# Altium PCB Main_Controller.PcbDoc (part 2 of 2)
Units mil, origin at the board's own origin, x right, y up, seen from the top; angles counter-clockwise.
Board outline 1790 x 1950 mil, 2 copper layers (Top Layer, Bottom Layer); 84 components, 64 nets, 348 pads, 50 vias.
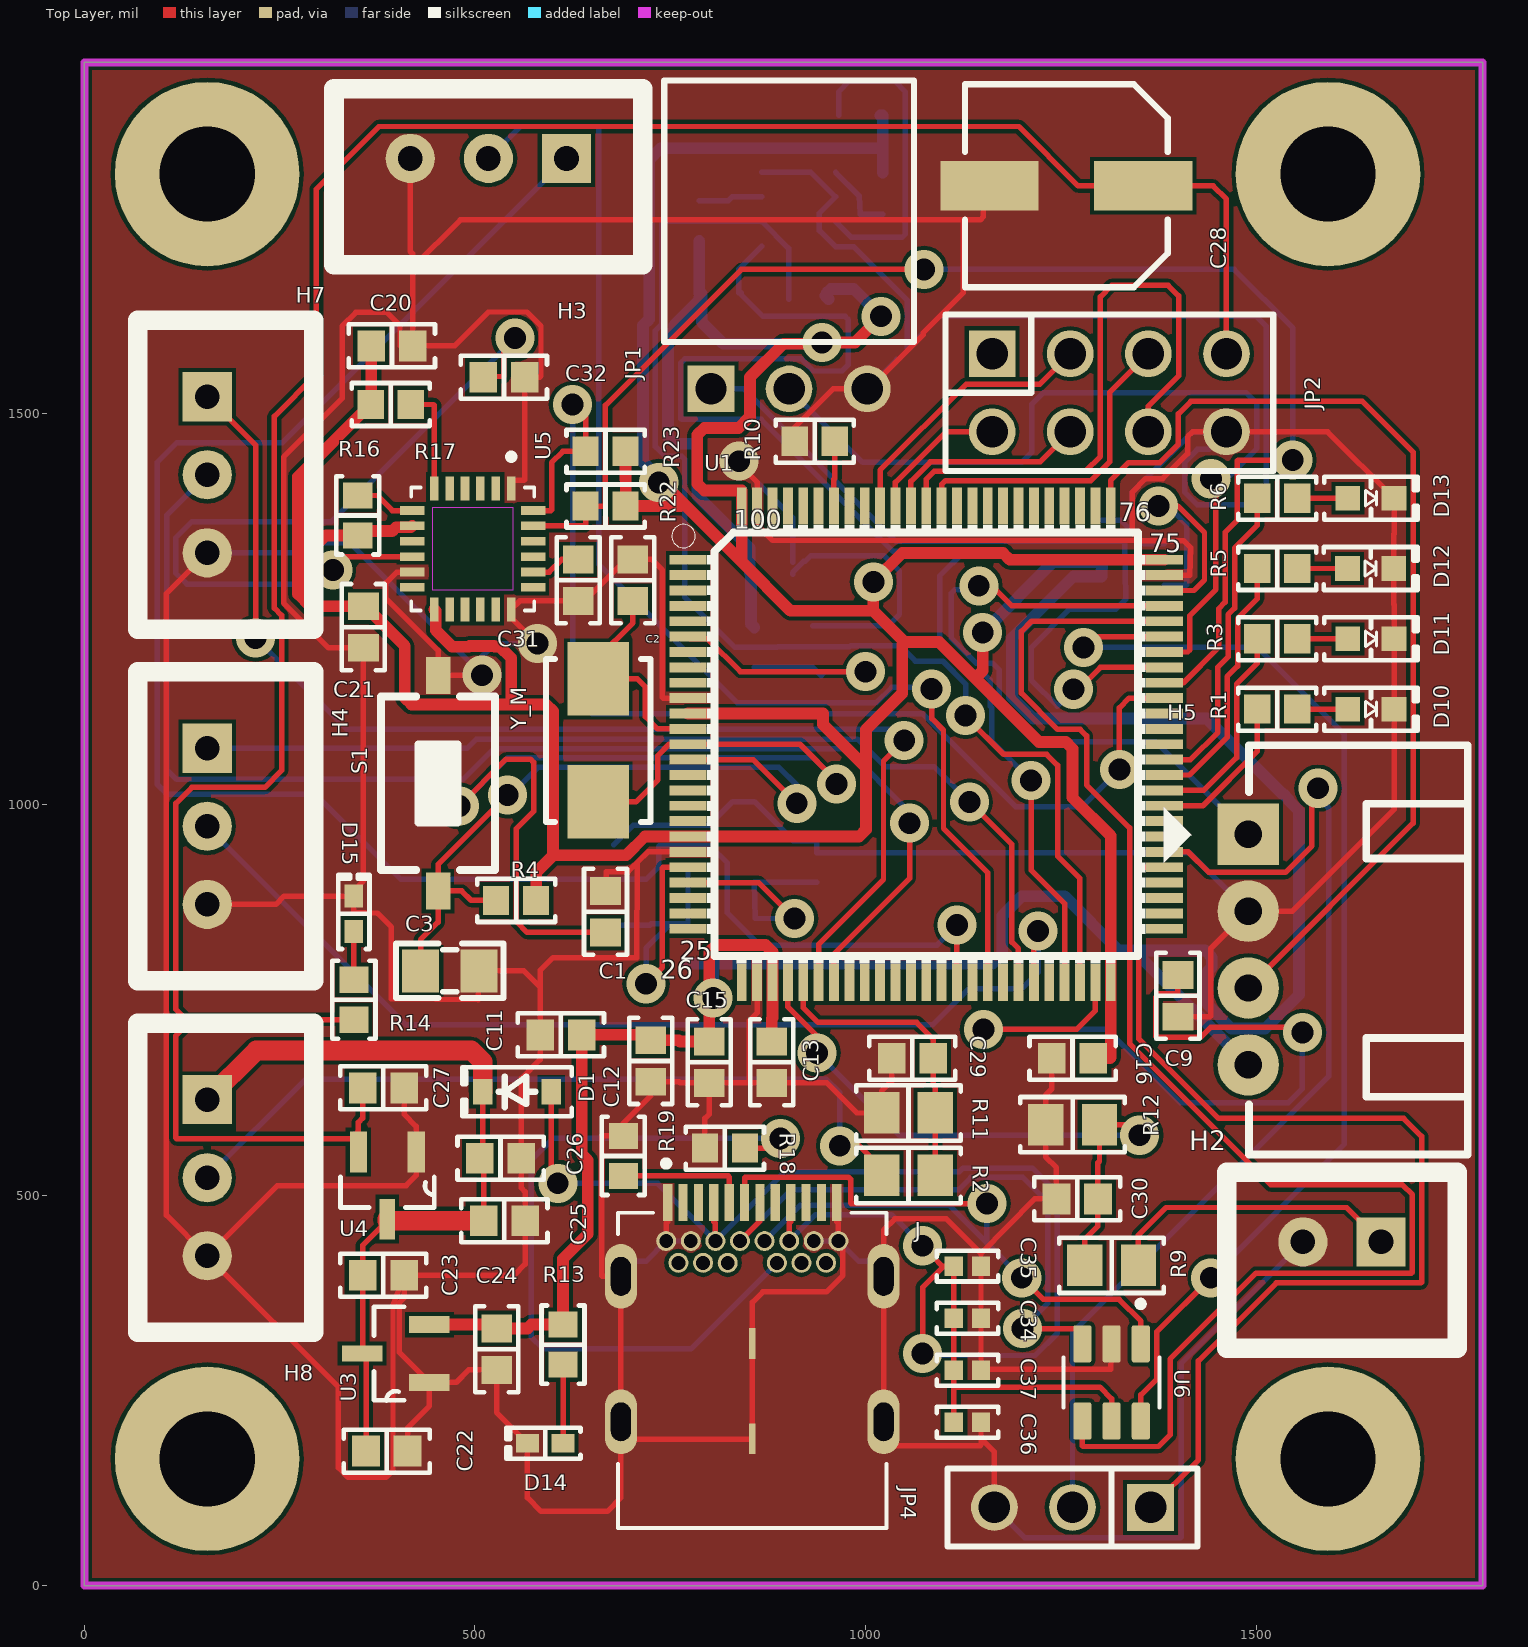
[diagram p0: Top Layer view]

## Part data (continued)
U1: "ARMÂ® CortexÂ®-M4 STM32F4 Microcontroller IC 32-Bit Single-Core 168MHz 512KB (512K x 8) FLASH 100-LQFP (14x14)", Package="LQFP-100 STMicroelectronics", Availability="In Stock", Check_prices=https://www.snapeda.com/parts/STM32F407VET6/STMicroelectronics/view-part/?ref=eda, MF=STMicroelectronics, MP=STM32F407VET6, Price=None, Purchase-URL=https://pricing.snapeda.com/search/part/STM32F407VET6/?ref=eda, SnapEDA_Link=https://www.snapeda.com/parts/STM32F407VET6/STMicroelectronics/view-part/?ref=snap
U2: "Gas, Humidity, Pressure, Temperature Sensor IÂ²C, SPI Output", Package="LGA-8 Bosch Tools", Availability="In Stock", Check_prices=https://www.snapeda.com/parts/BME680/Bosch+Sensortec/view-part/?ref=eda, MF="Bosch Sensortec", MP=BME680, Price=None, Purchase-URL=https://pricing.snapeda.com/search/part/BME680/?ref=eda, SnapEDA_Link=https://www.snapeda.com/parts/BME680/Bosch+Sensortec/view-part/?ref=snap
U3 U4: "Linear Voltage Regulator IC 1 Output 250mA SOT-23-3", Package="SOT-23-3 Microchip", Availability=Unavailable, MF=Microchip, MP=MCP1700T-3302E/TT, Price=None, SnapEDA_Link=https://www.snapeda.com/parts/MCP1700T-3302E/TT/Microchip/view-part/50877/?ref=snap
U5: "MPU-6050 series Accelerometer, Gyroscope, 3 Axis Sensor Evaluation Board", Package="QFN-24 InvenSense", Check_prices=https://www.snapeda.com/parts/MPU-6050/TDK+InvenSense/view-part/?ref=eda, MF="TDK InvenSense", MP=MPU-6050, SnapEDA_Link=https://www.snapeda.com/parts/MPU-6050/TDK+InvenSense/view-part/?ref=snap
U6: "17V Clamp 5A (8/20Âµs) Ipp Tvs Diode Surface Mount SOT-23-6", Package="SOT-23-6 STMicroelectronics", Check_prices=https://www.snapeda.com/parts/USBLC6-2SC6/STMicroelectronics/view-part/?ref=eda, MF=STMicroelectronics, MP=USBLC6-2SC6, SnapEDA_Link=https://www.snapeda.com/parts/USBLC6-2SC6/STMicroelectronics/view-part/?ref=snap
Y_M: library part NX5032GA-8MHZ-EXS00A-CG07039, "CRYSTAL 8.0000MHZ 18PF SMD", ESR (Equivalent Series Resistance)="300 Ohms", Frequency Stability=±30ppm, Frequency Tolerance=±20ppm, Load Capacitance=18pF, Manufacturer="NDK America, Inc.", Operating Mode=Fundamental, Operating Temperature="-40°C ~ 85°C", Package / Case="2-SMD, No Lead", Supplier Part Number 1=644-1318-1-ND, componentlink1description=Datasheet, componentlink1url=//media.digikey.com/pdf/Data%20Sheets/NDK%20PDFs/NX5032GA-8MHz-EXS00A-CG07039.pdf, componentlink2description="DigiKey Link", componentlink2url=https://www.digikey.com/en/products/detail/ndk-america-inc/NX5032GA-8MHZ-EXS00A-CG07039/8275423, Frequency="8 MHz", Height - Seated (Max)="0.059\" (1.50mm)", lastupdated="6/3/2024 8:02:22 PM", Lifecycle Status=Active, Minimum Order=1, Mounting Type="Surface Mount", packaging=TapeAndReel, Part Number=NX5032GA-8MHZ-EXS00A-CG07039, Part Status=Active, partid=609, Price=0.32, series=NX5032GA, Size / Dimension="0.197\" L x 0.126\" W (5.00mm x 3.20mm)", Supplier 1=DigiKey, Type="MHz Crystal"

## Free pads (board coordinates)
  round 236.22 hole 122.05: 9(157.11,162.11) 9(157.11,1807.11) 9(1592.11,162.11) 9(1592.11,1807.11)

## Via types
v1: diameter 50, hole 28, Top Layer to Bottom Layer, 50 vias

## Nets (pads, with @x,y where several pads share a name; then routed paths per layer and width w, separated by ;. In a path a pad name is that pad's centre, name@x,y a point inside that pad or via, vN(x,y) a via of type N, cw(c..) or ccw(c..) an arc to the next point about the centre after c; other vN are vias at no path point)
+5: C22.2 C23.2 C25.2 C26.2 D1.2 H8.1 U3.3 U4.3 | length 1156.6
  Top Layer w7: U3.3 U3.3@360.5,297.11 ; C22.2 U3.3@360.5,297.11 ; D1.2 510.06,547.11 511.13,546.05 C25.2 387.7,467.11 356.13,435.54 C23.2 356.13,301.49 U3.3@360.5,297.11
  Top Layer w25: H8.1 220,685 495.42,685 510.06,670.36 D1.2 ; U4.3 387.7,467.11 387.7,467 511.13,467 C25.2 ; C26.2 C26.2@510.06,547.11
+5_USB_A: C34.1 C35.1 C36.1 C37.1 D1.1 J.A4 J.A9 J.B4 J.B9 U6.5 | length 2133.6
  Top Layer w7: D1.1 597.66,523.34 v1(606,515) ; J.A4 805.79,465.97 807.76,464 J.B9 ; J.B4 902.24,464 904.21,465.97 J.A9 ; v1(1073,297) 1073,381.87 1099,407.87 ; v1(1073,435) 1099,407.87 ; C36.1 1113.21,255 ; U6.5 1315,239 1300,254 1114.21,254 1113.21,255 ; 1099,407.87 1100,408.87 C35.1 ; 1099,407.87 C35.1 ; 1113.21,255 C37.1 C34.1 C35.1
  Bottom Layer w7: v1(606,515) 733.86,515 J.B9 896.15,529.5 1119.85,529.5 1124.85,534.5 1213.5,534.5 1245.5,502.5 1245.5,323 1217.02,294.52 1075.48,294.52 v1(1073,297) ; J.B4 936.14,475 1033,475 v1(1073,435)
AD0_6050: U5.9
BME_SCL: R20.1 U1.47 U2.4 | length 1654.5
  Top Layer w7: v1(1212,1030.5) 1212,916 1254.87,873.13 U1.47
  Bottom Layer w7: R20.1@837.7,1655 837.7,1685.38 U2.4 ; R20.1 840.59,1653.03 868.62,1625 973.9,1625 978,1620.9 978,1563 970,1555 933.56,1555 918.02,1570.53 768.67,1570.53 763.69,1565.55 763.69,1494 764.69,1493 866.35,1493 1035.35,1324 1125,1324 1125.75,1323.25 1095,1292.5 1095,1205 1131,1169 1150,1169 1159.5,1159.5 1159.5,1125.94 1161.69,1123.75 1161.69,1080.81 v1(1212,1030.5)
BME_SDA: R21.1 U1.48 U2.3 | length 1635.4
  Top Layer w7: v1(1128.19,1114.02) 1130,1112.21 1130,1111 1176.96,1064.04 1231.96,1064.04 1246,1050 1246,934 1274.55,905.45 U1.48
  Bottom Layer w7: R21.1@901.52,1647.11 901.52,1712.03 U2.3 866.55,1747 743.1,1747 739,1742.9 739,1614.59 731,1606.59 731,1458.05 743.1,1445.95 764.63,1445.95 768.73,1441.85 768.73,1265.27 833,1201 887,1201 887.75,1201.75 979.38,1201.75 981.12,1203.5 1043.88,1203.5 1063.88,1183.5 1098.88,1183.5 1128.19,1154.19 v1(1128.19,1114.02)
BOOT0: R10.2 U1.94 | length 83.2
  Top Layer w7: U1.94 959.59,1416.59 960.59,1417.59 R10.2
CC1: J.A5 R19.2 | length 168.7
  Top Layer w7: R19.2 824.06,524.41 825.47,523 J.A5
CC2: J.B5 R18.2 | length 973.7
  Top Layer w7: R18.2 878.5,560 v1(891,572.5)
  Bottom Layer w7: J.B5 776.35,303 587.5,303 572,318.5 572,544.5 600,572.5 v1(891,572.5)
Debug_RX: JP1.2 U1.69 | length 1117.4
  Top Layer w7: U1.69 1412.5,1195.22 1415.13,1197.85 1415.13,1241.94 1448.5,1275.31 1448.5,1411 v1(1442.5,1417)
  Bottom Layer w7: JP1.2 996.22,1438 1200,1438 1213,1451 1213,1512.5 1227.5,1527 1487.5,1527 1501,1513.5 1501,1456 1462,1417 v1(1442.5,1417)
Debug_TX: JP1.1 U1.68 | length 1078.1
  Top Layer w7: v1(1266.5,1147.5) 1272.66,1147.5 1300.7,1175.54 U1.68
  Bottom Layer w7: JP1.1 844.21,1532.11 1039.32,1337 1332,1337 1333,1262.5 1320.5,1250 1261.32,1250 1212.5,1201.18 1212.5,1159 1245.5,1126 1266.5,1147 v1(1266.5,1147.5)
EmCo_Rx: JP4.2 U1.56 | length 1352.9
  Top Layer w7: U1.56 1413.19,939.31 1439.5,913 1537.5,913 1571.5,947 1571.5,1013 v1(1579.27,1020.77)
  Bottom Layer w7: JP4.2 1265,324 1592.87,651.87 1592.87,995.53 1579.27,1009.13 v1(1579.27,1020.77)
EmCo_Tx: JP4.1 U1.55 | length 1392.7
  Top Layer w7: JP4.1 1426,161 1426,287.5 1526,387.5 1711,387.5 1712,388.5 1712,575 1689,598 1452.02,598 1350,700.02 1350,918.63 1351,919.63 U1.55
GND: C1.1 C2.1 C3.2 C4.2 C5.1 C6.2 C7.2 C8.1 C9.1 C10.1 C11.1 C12.1 C13.1 C14.1 C15.1 C16.1 C17.1 C20.1 C21.2 C22.1 C23.1 C24.1 C25.1 C26.1 C27.1 C28.2 C29.1 C30.1 C31.1 C32.1 C34.2 C35.2 C36.2 C37.2 D10.2 D11.2 D12.2 D13.2 D14.2 D15.2 H2.2 H3.3 H4.3 H5.2 H7.3 H8.3 J.A1 J.A12 J.B1 J.B12 J.G1 J.G2 J.G3 J.G4 J.S1 J.S2 J.S3 J.S4 JP1.3 JP2.5 JP4.3 R10.1 R11.1 R12.1 R18.1 R19.1 S1.1 U1.10 U1.20 U1.27 U1.74 U1.99 U2.1 U2.5 U2.7 U3.1 U4.1 U5.1 U5.11 U5.18 U6.2 | length 17545.2
  Top Layer w7: H4.3 245,872.11 255.53,882.64 D15.2 ; H7.3 105,1270 105,474.22 H8.3 ; C27.1 409.28,603.42 424.7,588 U4.1 424.7,525 411.7,512 247,512 H8.3 ; C22.1 413.65,202 441.58,229.93 U3.1 ; H3.3 417.11,1708.15 420.26,1705 420.26,1687.5 ; U5.11 400,1297.58 386,1283.58 386,1264 452.7,1197.3 S1.1@452.7,1165 ; S1.1 S1.1@452.7,1165 ; v1(508.82,1165.5) 453.2,1165.5 S1.1@452.7,1165 ; U5.1 546.32,1415 562.69,1415 563.69,1416 C32.1 583,1547.11 584.5,1548.61 584.5,1612.5 566.5,1630.5 517.18,1630.5 473.79,1587.11 C20.1 ; v1(580,1206) 546.32,1239.68 U5.18 557.31,1260.54 C31.1 640,1260.54 693.15,1313.69 C2.1 726.31,1313.69 740,1300 740,1137.17 741,1136.17 U1.10 ; C1.1 668.11,914 695.95,914 708,926.05 ; J.B12 744.76,464 746.73,465.97 J.A1 ; U1.20 721.26,939.31 708,926.05 ; R18.1 794.41,598 800,603.59 C15.1 ; v1(838,1439.5) 838,1436 861.17,1412.83 U1.99 861.17,1357.83 880.89,1338.11 1352.08,1337.92 ; U1.27 861.17,733.17 851,723 851,644.43 852,643.43 ; R10.1 909.41,1483.02 958.5,1532.11 JP1.3 1004.49,1532.11 1074,1601.62 1074,1604 1125,1655 1125,1748.5 ; J.A12 963.27,465.97 965.24,464 J.B1 971,441.1 971,397 950,376 868.5,376 855,362.5 J.G3 J.G4 855,187 J.S3@686.89,187 ; C29.1 1033.42,645.87 1020.55,633 R11.1 989,605 950.58,643.43 C13.1 852,643.43 ; C36.2 1147.86,188.16 ; C37.2 C37.2@1147.86,287.5 ; C28.2 1151,1784.42 1151,1752.6 1146.9,1748.5 1125,1748.5 ; JP4.3 1165,171.02 1147.86,188.16 ; C16.1 1238.43,635.77 1230.65,628 R12.1 1230.65,548.79 1244.45,535 C30.1 1216.5,495 1147.86,425 ; U6.2 1314,277 1158.36,277 C37.2@1147.86,287.5 ; U1.74 1415,1293.65 1416.29,1328.71 1407.08,1337.92 1352.08,1337.92 ; C9.1 1441,728.43 1442,729.43 1442,815.43 H5.2 1546.43,863.43 1676.64,993.63 D10.2 D11.2 1676.64,1256 1676.17,1256.47 D12.2 1676.17,1346 1676.64,1346.47 D13.2 1591.64,1477.11 JP2.5 1418.61,1477.11 1412.53,1471.03 1412.53,1449.19 1380.5,1417.17 1358.67,1417.17 1341.5,1400 1341.5,1348.5 1352.08,1337.92 ; H8.3 325,254.22 325,151 337.5,138.5 386,138.5 395,147.5 395,358.72 C23.1 ; D15.2 345,862 375,861 393,843 393,751 504.28,750 C3.2 562.5,786.98 583.42,766.05 ; D15.2 345,890 357.11,902.11 C21.2 312.5,1200.54 255,1258.04 255,1445 330,1520 330,1612.5 347.5,1630 387.5,1630 404,1613.5 404,1587.11 C20.1 ; C23.1 409.28,368.28 403,362 403,298.69 U3.1 ; C23.1 550,397.11 564.28,411.39 C25.1 564.28,504 559.28,509 C26.1 559.28,649.28 583.42,673.42 C11.1 583.42,766.05 ; C20.1 420.26,1687.5 ; 420.26,1687.5 481.26,1748.5 1125,1748.5 ; U3.1 476,260.11 491.93,276.04 C24.1 527.7,221.84 D14.2 567,182.11 567,112.5 584.5,95 669.39,95 686.89,112.5 J.S3@686.89,187 ; 583.42,766.05 583.42,787.5 599.92,804 707,804 708,926.05 ; J.S3@686.89,187 J.S3 J.S1 663,395.83 662,396.83 662,574.59 663,575.59 R19.1 690,592 725,627 C12.1 761,645 762.57,643.43 C15.1 ; C15.1 852,643.43 ; 1147.86,188.16 1147.86,180 1146.86,179 1023.11,179 J.S4 J.S2 1023.11,455.07 1037.5,469.46 1103.4,469.46 1147.86,425 ; C37.2@1147.86,287.5 C34.2 C35.2 1147.86,425
  Bottom Layer w7: H7.3 273.92,1322.11 286.72,1334.9 340.1,1334.9 v1@509.41,1165.59 ; v1(508.82,1165.5) 508.91,1165.59 v1@509.41,1165.59 ; v1(580,1206) 525,1206 510,1191 510,1165 v1@509.41,1165.59 ; C4.2 702.7,973.69 C5.1 800,973.69 830,1003.69 C6.2 907.7,953.69 C7.2 937.7,938 1415.43,938 H5.2 ; J.S1 686.89,415 718.66,415 J.B12 J.G2 ; v1(838,1439.5) 838,1436 906.58,1367.42 C14.1@906.58,1310 ; U2.1 930.18,1809.35 U2.7 941,1757.18 941,1734.76 U2.5 984.87,1714.08 1053.5,1645.45 1053.5,1581.12 ; C14.1 906.58,1296.97 920.79,1311.19 922.76,1311.19 930.08,1318.5 1023.88,1318.5 1043.5,1298.88 1043.5,1243.5 1028.69,1228.69 C17.1 ; J.G1 J.B1 991.34,415 1023.11,415 J.S2 ; JP1.3 1040,1570 ; 1041.19,1568.81 1050,1577.62 ; JP4.3 1204,61 1403,61 1404,62 1404,284 H2.2 ; C8.1 1326.81,1363.69 1341.5,1349 ; C10.1 1356.81,1333.69 1341.5,1349 ; 1050,1577.62 1053.5,1581.12 ; 1050,1577.62 1053.5,1581.12 ; 1053.5,1581.12 1053.5,1583.5 1095,1625 1500.5,1625 1513,1612.5 1513,1396 1500.5,1383.5 1425,1383.5 1409,1399.5 1409,1438.63 1425,1454.63 1439.63,1454.63 JP2.5 1418.61,1477.11 1341.5,1400 1341.5,1349
INT_6050: U5.12
LED1: R1.1 U1.59 | length 201.7
  Top Layer w7: U1.59 1432,998.37 1501.52,1067.89 R1.1
LED2: R3.1 U1.60 | length 272.6
  Top Layer w7: U1.60 1433,1018.06 1475,1060.06 1475,1154.01 1501.52,1180.53 R3.1
LED3: R5.1 U1.61 | length 332.2
  Top Layer w7: U1.61 1414.74,1037.74 1463,1086 1463,1163.71 1476.29,1177 1476.29,1238 1501.52,1263.23 R5.1
LED4: R6.1 U1.62 | length 403.3
  Top Layer w7: U1.62 1416,1057.43 1451,1092.43 1451,1175.71 1464.29,1189 1464.29,1243.1 1472.5,1251.31 1472.5,1328.19 1501.52,1357.21 R6.1
MOTOR3A: H3.1 U1.40 | length 2378.9
  Top Layer w7: U1.40 v1(1117.07,845.5)
  Bottom Layer w7: H3.1 253,1463 118,1463 93.11,1438.11 93.11,1025.89 106,1013 296,1013 405,904 719,904 735,920 735,946 736,947 801,947 823,925 823,861.14 864.14,820 1091.57,820 v1(1117.07,845.5)
MOTOR3B: H3.2 U1.42 | length 1632.3
  Top Layer w7: v1(1084.66,1147.64) 1085,1147.3 1085,1109.84 1099.81,1095.03 1099.81,969.5 1156.44,912.87 U1.42
  Bottom Layer w7: H3.2 558,1868 657,1868 658.5,1866.5 658.5,1307.5 836,1130 1013.59,1130 1033.59,1150 1082.3,1150 v1(1084.66,1147.64)
MOTOR4A: H4.1 U1.44 | length 1271.3
  Top Layer w7: v1(1133.31,1003) 1187.5,948.81 1187.5,823.81 1195.81,815.5 U1.44
  Bottom Layer w7: H4.1 490.31,1072.11 501.82,1083.62 989.74,1083.62 1025,1048.36 1087.95,1048.36 v1(1133.31,1003)
MOTOR4B: H4.2 U1.45 | length 1318.4
  Top Layer w7: U1.45 1215.5,832.49 v1(1221,837.99)
  Bottom Layer w7: H4.2 411.52,717.7 1085.7,717.7 1132,764 1200,764 1221,785 v1(1221,837.99)
MOTOR_PUMPA: H7.1 U1.31 | length 1574.9
  Top Layer w7: H7.1 219,1460.22 v1(219,1213) ; U1.31 939.91,820.91 1023,904 1023,1055.5 v1(1049.5,1082)
  Bottom Layer w7: v1(219,1213) 335.5,1096.5 1035,1096.5 v1(1049.5,1082)
MOTOR_PUMPB: H7.2 U1.32 | length 1664.2
  Top Layer w7: U1.32 959.59,808.5 1056.5,905.41 v1(1056.5,976)
  Bottom Layer w7: H7.2 105.11,1370.11 105.11,1044.89 118,1032 484.58,1032 524.2,1071.62 975.42,1071.62 1056.5,990.54 v1(1056.5,976)
MPU_SCL: R22.1 U1.67 U5.23 | length 1805.7
  Top Layer w7: U5.23 640.16,1356.64 641.52,1358 R22.1 666,1382.11 667,1383.11 667,1511 841,1685 v1(1075,1685) ; U1.67 1406.85,1155.85 1452,1201 1452,1250.5 1460.5,1259 1460.5,1348.5 1476,1364 1476,1440 1477,1441 v1(1547,1441)
  Bottom Layer w7: v1(1075,1685) 1472,1685 1547,1610 v1(1547,1441)
MPU_SDA: R23.1 U1.66 U5.24 | length 1492.5
  Top Layer w7: U5.24 597,1376.32 598,1377.32 598,1437.61 612.5,1452.11 R23.1 641.52,1495.48 v1(625,1512) ; v1(1325,1045) 1325,1123.67 1337.5,1136.17 U1.66
  Bottom Layer w7: v1(625,1512) 625,1141 650,1116 1073.5,1116 1192.5,997 1277,997 v1(1325,1045)
NetC18_1: C18.1 U2.6 | length 408.6
  Bottom Layer w7: U2.6 981.96,1726.08 1046.58,1726.08 1051,1730.5 1051,1912.5 1037.5,1926 979.04,1926 965.54,1912.5 C18.1
NetC19_1: C19.1 U2.8 | length 95.5
  Bottom Layer w7: U2.8 991.96,1779.07 993,1755.54 C19.1
NetC31_2: C31.2 U5.20 | length 64.1
  Top Layer w7: U5.20 595,1297.58 611.1,1313.69 C31.2
NetC32_2: C32.2 U5.10 | length 989.4
  Top Layer w7: v1(318,1300) 335.27,1317.27 U5.10 ; C32.2 537,1548.11 537,1583 v1(551,1597)
  Bottom Layer w7: v1(318,1300) 300,1282 131,1282 117.11,1295.89 117.11,1341.72 137.5,1362.11 316.11,1362.11 v1(551,1597)
NetD10_1: D10.1 R1.2 | length 64.9
  Top Layer w7: R1.2 D10.1
NetD11_1: D11.1 R3.2 | length 64.9
  Top Layer w7: R3.2 D11.1
NetD12_1: D12.1 R5.2 | length 64.4
  Top Layer w7: R5.2 D12.1
NetD13_1: D13.1 R6.2 | length 64.9
  Top Layer w7: R6.2 D13.1
NetD14_1: D14.1 R13.1 | length 100.8
  Top Layer w7: D14.1 R13.1
NetD15_1: D15.1 R14.1 | length 61.8
  Top Layer w7: R14.1 D15.1
NetJ_A6: J.A6 J.B6 U6.1 | length 1015.9
  Top Layer w7: J.A6 845.16,522 846.16,523 978,523 981,520 981,490 982,489 v1(1155.5,489) ; v1(1200,394) 1227.72,366.28 1324.63,366.28 1352.4,338.5 U6.1
  Bottom Layer w7: J.B6 916.65,487 1107,487 1155.5,438.5 ; v1(1155.5,489) 1155.5,438.5 ; v1(1200,394) 1155.5,438.5
NetJ_A7: J.A7 J.B7 U6.3 | length 772.2
  Top Layer w7: J.B7 864.84,466.69 J.A7 ; v1(1201,329) 1277.6,329 U6.3
  Bottom Layer w7: J.B7 905.15,507 1119.5,507 1135,522.5 1201.5,522.5 1233.5,490.5 1233.5,361.5 v1(1201,329)
NetR15_1: R15.1 U2.2 | length 82.2
  Bottom Layer w7: R15.1 824,1772.7 829.16,1777.86 U2.2
NetR16_1: R16.1 U5.7 | length 77.5
  Top Layer w7: R16.1 375,1395.59 394.27,1376.32 U5.7
NetR17_1: R17.1 U5.6 | length 137
  Top Layer w7: R17.1 446.79,1512.11 447.9,1511 U5.6
NRST: C3.1 R4.1 S1.2 U1.14 | length 931
  Top Layer w7: C3.1 430.47,827 452.7,849.23 S1.2 ; R4.1 495.2,877.11 483,889.31 S1.2 ; v1(541.5,1012.12) 452.7,923.32 S1.2 ; U1.14 856.07,1057.43 v1(912,1001.5)
  Bottom Layer w7: v1(541.5,1012.12) 553.88,1024.5 557.7,1024.5 580.82,1047.62 889,1047.62 912,1024.62 v1(912,1001.5)
OSC_IN: C2.2 U1.12 Y_M.2 | length 281.8
  Top Layer w7: C2.2 702.11,1232.41 657.7,1188 Y_M.2 708,1160.85 718.2,1150.65 718.2,1112.5 733.91,1096.8 U1.12
OSC_OUT: C1.2 U1.13 Y_M.1 | length 1356.8
  Top Layer w7: v1(480,998) 540,1058 570.9,1058 575,1053.9 575,991 553,969 553,850 566.86,836.14 C1.2 ; Y_M.1 706,1003.37 734,1031.37 734,1062.5 748.61,1077.11 U1.13 915.89,1077.11 963,1030 v1(963,1026)
  Bottom Layer w7: v1(480,998) 541.62,1059.62 933.38,1059.62 963,1030 v1(963,1026)
RF_CE: JP2.6 U1.88 | length 775.6
  Top Layer w7: U1.88 1077.7,1416.27 1088.12,1426.69 1281.69,1426.69 1300.53,1445.53 1300.53,1650 1315.06,1664.53 1387.5,1664.53 1401,1651.03 1401,1548.89 1362.11,1510 JP2.6
RF_MISO: JP2.8 U1.90 | length 180.7
  Top Layer w7: U1.90 1038.33,1412.33 1103.11,1477.11 JP2.8
RF_MOSI: JP2.2 U1.91 | length 351
  Top Layer w7: U1.91 1018.65,1428 1128.65,1538 1223,1538 JP2.2
RF_SCK: JP2.7 U1.89 | length 261.7
  Top Layer w7: U1.89 1058.02,1413.56 1083.15,1438.69 1223.69,1438.69 JP2.7
RF_SS: JP2.3 U1.87 | length 413.6
  Top Layer w7: U1.87 1097.39,1409.69 1102.39,1414.69 1288.53,1414.69 1312.53,1438.69 1312.53,1527.53 JP2.3
SWCLK: H5.3 U1.76 | length 1284.6
  Top Layer w7: U1.76 1313.92,1414.69 1336.84,1437.61 1376.95,1437.61 1400.53,1461.19 1400.53,1500 1416.53,1516 1636,1516 1701,1451 1701,976 H5.3
SWDIO: H5.1 U1.72 | length 876.2
  Top Layer w7: v1(1145,1280) 1145,1293.5 1146.5,1295 1187.22,1254.28 U1.72
  Bottom Layer w7: v1(1145,1280) 1139.69,1274.69 1114.1,1274.69 1110,1270.59 1110,1212.62 1141.62,1181 1162.5,1181 1171.5,1172 1171.5,1130.91 1173.69,1128.72 1173.69,1124.31 1217.96,1080.04 1371.81,1080.04 H5.1
USBC_DM: U1.70 U6.6 | length 1483.3
  Top Layer w7: v1(1278.87,1201.09) 1278.87,1211.87 1281.91,1214.91 U1.70 ; U6.6 1352.4,244 1373,264.6 1373,325 v1(1442,394)
  Bottom Layer w7: v1(1278.87,1201.09) 1501.91,1201.09 1612.77,1090.23 1612.77,564.77 v1(1442,394)
USBC_DP: U1.71 U6.4 | length 1935.8
  Top Layer w7: U6.4 1277.6,179 1278.6,178 1375,178 1390,193 1390,290 1500,400 1699,400 1700,401 1700,500.5 1687.5,513 1519,513 1338,694 1338,970 1283,1025 1283,1087.94 1274.9,1096.04 1246,1096.04 1199.5,1142.54 1199.5,1221.59 1212.5,1234.59 U1.71
V1_Meas: C29.2 R2.1 R11.2 U1.30 | length 391.1
  Top Layer w7: U1.30 920.22,740 939.22,721 1065.57,721 1086.57,700 C29.2 1086.57,640.87 1089.45,638 R11.2 R2.1
V_12V: H8.2 R2.2 | length 1011.9
  Top Layer w7: v1(967,563) 992,563 1020.55,534.45 R2.2
  Bottom Layer w7: H8.2 283,648 950,648 967,631 v1(967,563)
V_16V: H2.1 R9.2 | length 382.1
  Top Layer w7: R9.2 1349.45,448.73 1384.72,484 1616,484 H2.1
V_ESC_Meas: C30.2 R9.1 R12.2 U1.29 | length 807.1
  Top Layer w7: U1.29 900.54,741 938,703.54 v1(938,682) ; R9.1 1280.55,443 1297.6,460.05 C30.2 1297.6,541 1299.55,542.95 R12.2 1337.5,590 v1(1351,576.5)
  Bottom Layer w7: v1(938,682) 1043.5,576.5 v1(1351,576.5)
VBAT: C17.2 R8.2 U1.6 | length 394.8
  Top Layer w7: U1.6 775.38,1212.11 797.64,1212.11 839.74,1170 v1(1000,1170)
  Bottom Layer w7: R8.2 C17.2 943.24,1165 948.24,1170 v1(1000,1170)
VCAP_1: C9.2 U1.49 | length 1017
  Top Layer w7: v1(1151,712) 1270.24,712 1294.24,736 U1.49 ; C9.2 1400,758.64 1399,757.64 1376,757.64 1371.81,753.46 1371.81,703.39 1373,702.21 1429.34,702.21 1442.13,715 1555.27,715 1555.27,712.08 v1(1559.37,707.98)
  Bottom Layer w7: v1(1151,712) 1309,712 1403,618 1541,618 1559,636 1559,707.61 v1(1559.37,707.98)
VCAP_2: C10.2 U1.73 | length 341.8
  Top Layer w7: v1(1375,1382) 1400,1382 1434,1348 1434,1287.5 1420.46,1273.96 U1.73
  Bottom Layer w7: v1(1375,1382) 1387.5,1382 1411,1358.5 1411,1281.54 1410,1280.54 C10.2
VCC: C8.2 C11.2 C12.2 C13.2 C14.2 C15.2 C16.2 C18.2 C19.2 C20.2 C21.1 C24.2 H5.4 R4.2 R7.1 R8.1 R13.2 R15.2 R16.2 R17.2 R20.2 R21.2 R22.2 R23.2 U1.11 U1.19 U1.28 U1.50 U1.75 U1.100 U3.2 U5.8 U5.13 | length 9671.1
  Top Layer w15: C20.2 367.11,1512.11 R17.2 366,1512.11 273.5,1419.61 273.5,1308.8 ; U5.8 417.88,1354.96 398.82,1354.96 393.86,1350 355.59,1350 R16.2 309.11,1344.41 273.5,1308.8 ; U3.2 527.7,334.11 C24.2 567.19,329.19 572.11,334.11 R13.2 612.7,418.28 644.49,450.08 644.49,544.41 636.57,552.33 C11.2 720,705 725,700 C12.2 761,698.15 762.58,696.57 C15.2 v1@800,752 ; U5.13 449.57,1247.88 449.57,1223.06 470.63,1202 492.29,1202 493.29,1203 524.36,1203 525.36,1202 531.82,1202 546.32,1187.5 546.32,1128 ; R4.2 578.29,913.29 600,935 ; R22.2 R22.2@693,1382.11 ; R23.2 692.7,1416 693,1415.7 R22.2@693,1382.11 ; v1(735.23,1412.42) 739.58,1412.42 766.39,1385.61 841.48,1310.52 ; 762.89,1382.11 R22.2@693,1382.11 ; U1.11 945.5,1116.48 945.5,1102.5 1000.5,1047.5 ; v1(805,752) v1@800,752 ; C13.2 880,726 880.85,726.85 880.85,811.21 872.06,820 808.79,820 800,811.21 v1@800,752 ; v1(1020,1625) 986.43,1591.43 v1(944.5,1591.43) 943.07,1590 895,1590 852,1547 852,1496.5 837.5,1482 793.51,1482 784.73,1473.21 784.73,1410.79 793.51,1402 841.48,1402 841.48,1310.52 ; v1(1150,1220) 1150,1171.04 1140.5,1161.54 ; C16.2 1312.92,675 1313.92,676 U1.50 1313.92,959.92 1265,1008.84 1265,1071.25 1256.21,1080.04 1222,1080.04 1140.5,1161.54 ; U1.75 1184.7,1313.33 1176.05,1321.98 1046.98,1321.98 v1(1010,1285) 1010,1248.16 ; 273.5,1308.8 273.5,1269.5 289.31,1253.69 C21.1 359.31,1253.69 410,1203 410,1136.79 418.79,1128 546.32,1128 ; 546.32,1128 591.21,1128 600,1119.21 600,935 ; 600,935 693.62,935 717.62,959 U1.19 991.71,959 1000.5,967.79 1000.5,1047.5 ; 841.48,1310.52 903.84,1248.16 1010,1248.16 ; 1000.5,1047.5 1000.5,1095.5 1047.16,1142.16 1047.16,1204.76 1050.28,1207.88 ; 1010,1248.16 1050.28,1207.88 ; 1050.28,1207.88 1094.16,1207.88 1140.5,1161.54
  Bottom Layer w15: v1(735.23,1412.42) 735.23,1418.54 715,1438.77 715,1613.22 723,1621.22 723,1825.5 737.5,1840 1021.11,1840 1022.11,1839 ; R7.1 1162.5,795.93 1175,808.43 1175,857.5 1200,882.5 1254.87,882.5 1324.37,813 1343.57,813 ; R20.2@787.11,1647.11 786.52,1647.11 786.52,1645.14 777.29,1635.91 755,1613.62 755,1607.97 747,1599.97 747,1470.73 755.79,1461.95 783,1461.95 784.73,1460.22 784.73,1395.27 851.6,1328.4 851.6,1296.82 C14.2 853.43,1230.99 R8.1 ; R20.2@787.11,1654.7 R15.2 ; R20.2@789.7,1654.7 790.41,1654 790.41,1617.53 805.06,1602.89 817.95,1590 943.07,1590 v1(944.5,1591.43) ; v1(805,752) 805,794.93 ; R21.2@948.56,1651.25 R21.2@952.7,1647.11 ; R21.2 955.59,1660 985,1660 v1(1020,1625) ; C18.2 1022.11,1882.11 1022.11,1839 ; C19.2 1022.11,1839 ; v1(1150,1220) 1240.54,1310.54 C8.2 1302.1,1291.9 1266.22,1291.9 1187.5,1213.18 1187.5,1137.54 1215.04,1110 1437,1110 1533.28,1013.72 1534.55,1013.72 1541.87,1006.4 1541.87,1005.13 1555,992 1555,756.64 1511.49,713.13 1468.51,713.13 1438.13,743.51 1438.13,786.49 1443.43,791.79 1443.43,804.21 1434.64,813 1343.57,813 ; H5.4 1343.57,813
VCCNRF: C27.2 C28.1 JP2.4 R14.2 U4.2 | length 3338.2
  Top Layer w7: R14.2 137.5,724.41 ; U4.2 350.7,582.07 ; C27.2 356.13,598.43 350.7,593 350.7,582.07 ; JP2.4 1462.11,1775 1445,1792.11 C28.1 1272.11,1792.11 1196.22,1868 377,1868 297,1788 297,1551 243,1497 243,1251.49 252.5,1241.99 252.5,1043.5 231,1022 137.5,1022 117,1001.5 117,737.5 130.09,724.41 137.5,724.41 ; 137.5,724.41 117,703.91 117,573 118,572 340.63,572 344.72,576.09 350.7,582.07
VDDA: C6.1 C7.1 U1.22 | length 332.3
  Top Layer w7: U1.22 863.06,899.94 v1(909,854)
  Bottom Layer w7: v1(909,854) 858.7,854 C6.1 C7.1
VREF+: C4.1 C5.2 R7.2 U1.21 | length 448.4
  Top Layer w7: v1(719,770.5) 740,791.5 740,918.63 741,919.63 U1.21
  Bottom Layer w7: C4.1 724,845.54 725.57,847.11 750,847.11 ; v1(719,770.5) 719,816.11 750,847.11 ; C5.2 R7.2 750,847.11
pads on no net: J.A2 J.A3 J.A8 J.A10 J.A11 J.B2 J.B3 J.B8 J.B10 J.B11 JP2.1 U1.1 U1.2 U1.3 U1.4 U1.5 U1.7 U1.8 U1.9 U1.15 U1.16 U1.17 U1.18 U1.23 U1.24 U1.25 U1.26 U1.33 U1.34 U1.35 U1.36 U1.37 U1.38 U1.39 U1.41 U1.43 U1.46 U1.51 U1.52 U1.53 U1.54 U1.57 U1.58 U1.63 U1.64 U1.65 U1.77 U1.78 U1.79 U1.80 U1.81 U1.82 U1.83 U1.84 U1.85 U1.86 U1.92 U1.93 U1.95 U1.96 U1.97 U1.98 U5.2 U5.3 U5.4 U5.5 U5.14 U5.15 U5.16 U5.17 U5.19 U5.21 U5.22

## Polygon pours and split planes (outlines as drawn)
GND on Top Layer "GND_L01_P000" (solid, pour order 0): 0,0 1790,0 1790,1950 0,1950
GND on Bottom Layer "GND_L02_P001" (solid, pour order 1): 0,0 1790,0 1790,1950 0,1950

## Keep-outs
Keep-Out Layer:
  the board outline again, w10

## Text inside footprints (layer, text, board x,y; h text height)
U1: Top Overlay "100" at 831.17,1353.22 h24.05; Top Overlay "76" at 1323.93,1362.74 h24.02; Top Overlay "75" at 1363.19,1323.22 h24; Top Overlay "26" at 737.7,777.11 h24.02; Top Overlay "25" at 762.46,801.27 h24.02